# Altium PCB PCB1.PcbDoc
Units mm, origin at the board's own origin, x right, y up, seen from the top; angles counter-clockwise.
Board outline 45 x 30 mm, 4 copper layers (Top Layer, Layer 1, Layer 2, Bottom Layer), stack 1.2 mm thick; 31 components, 21 nets, 116 pads, 35 vias.
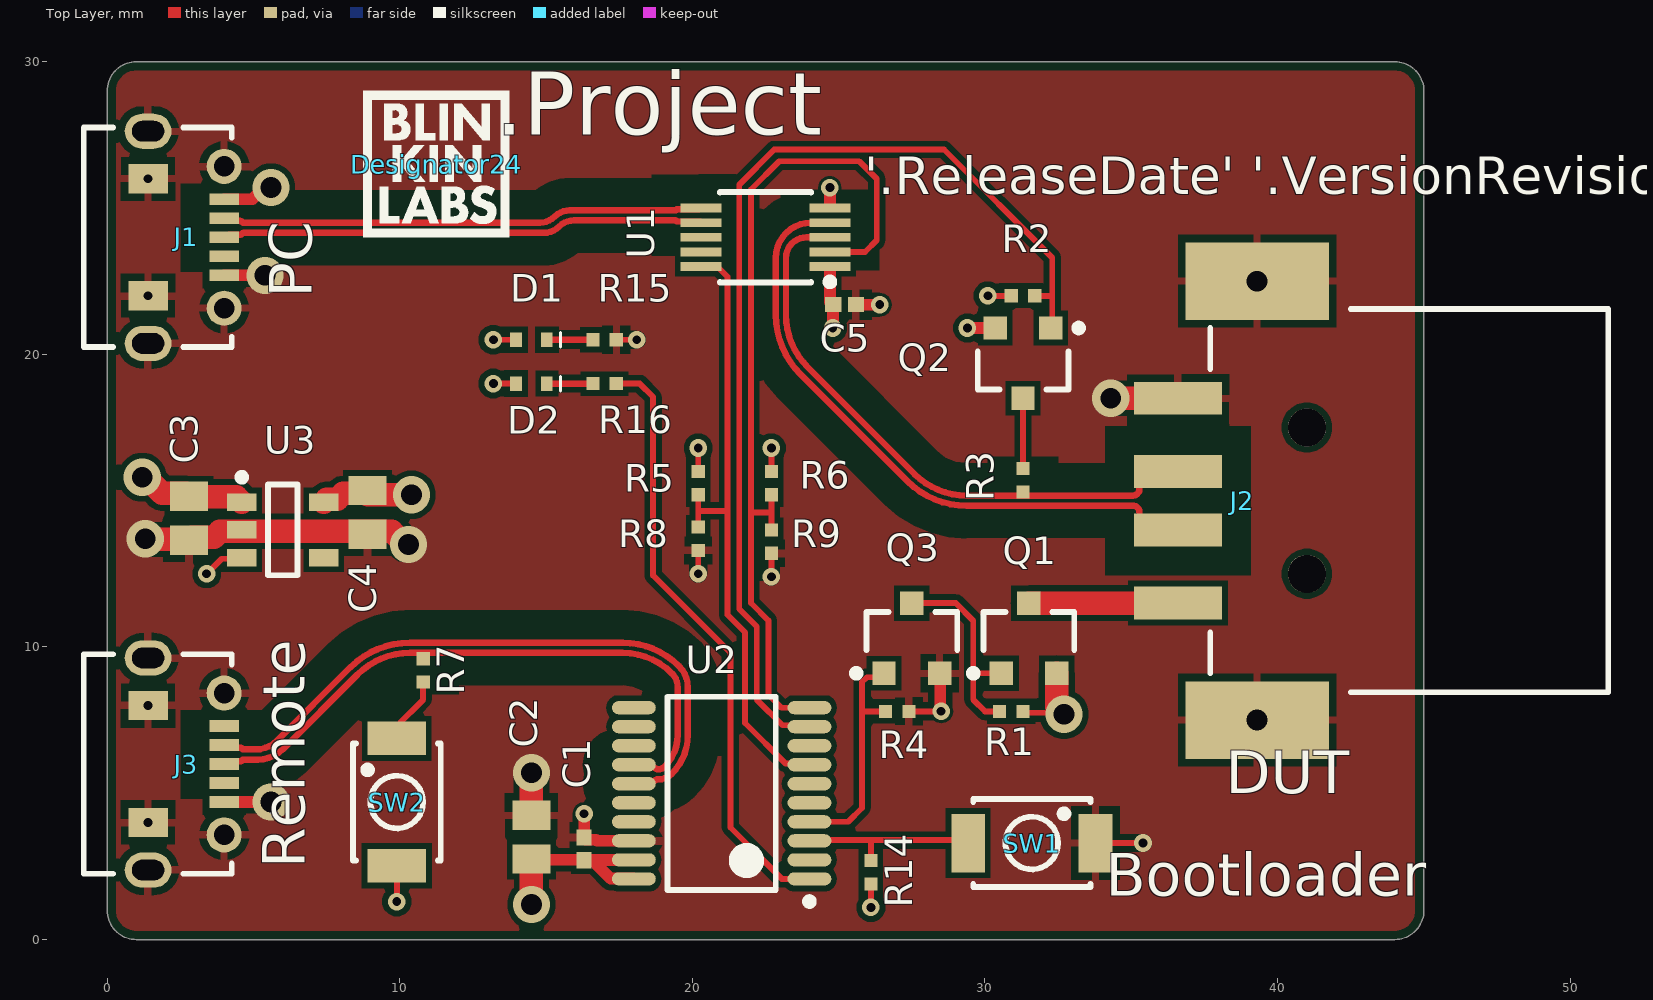
[diagram p0: Top Layer view]
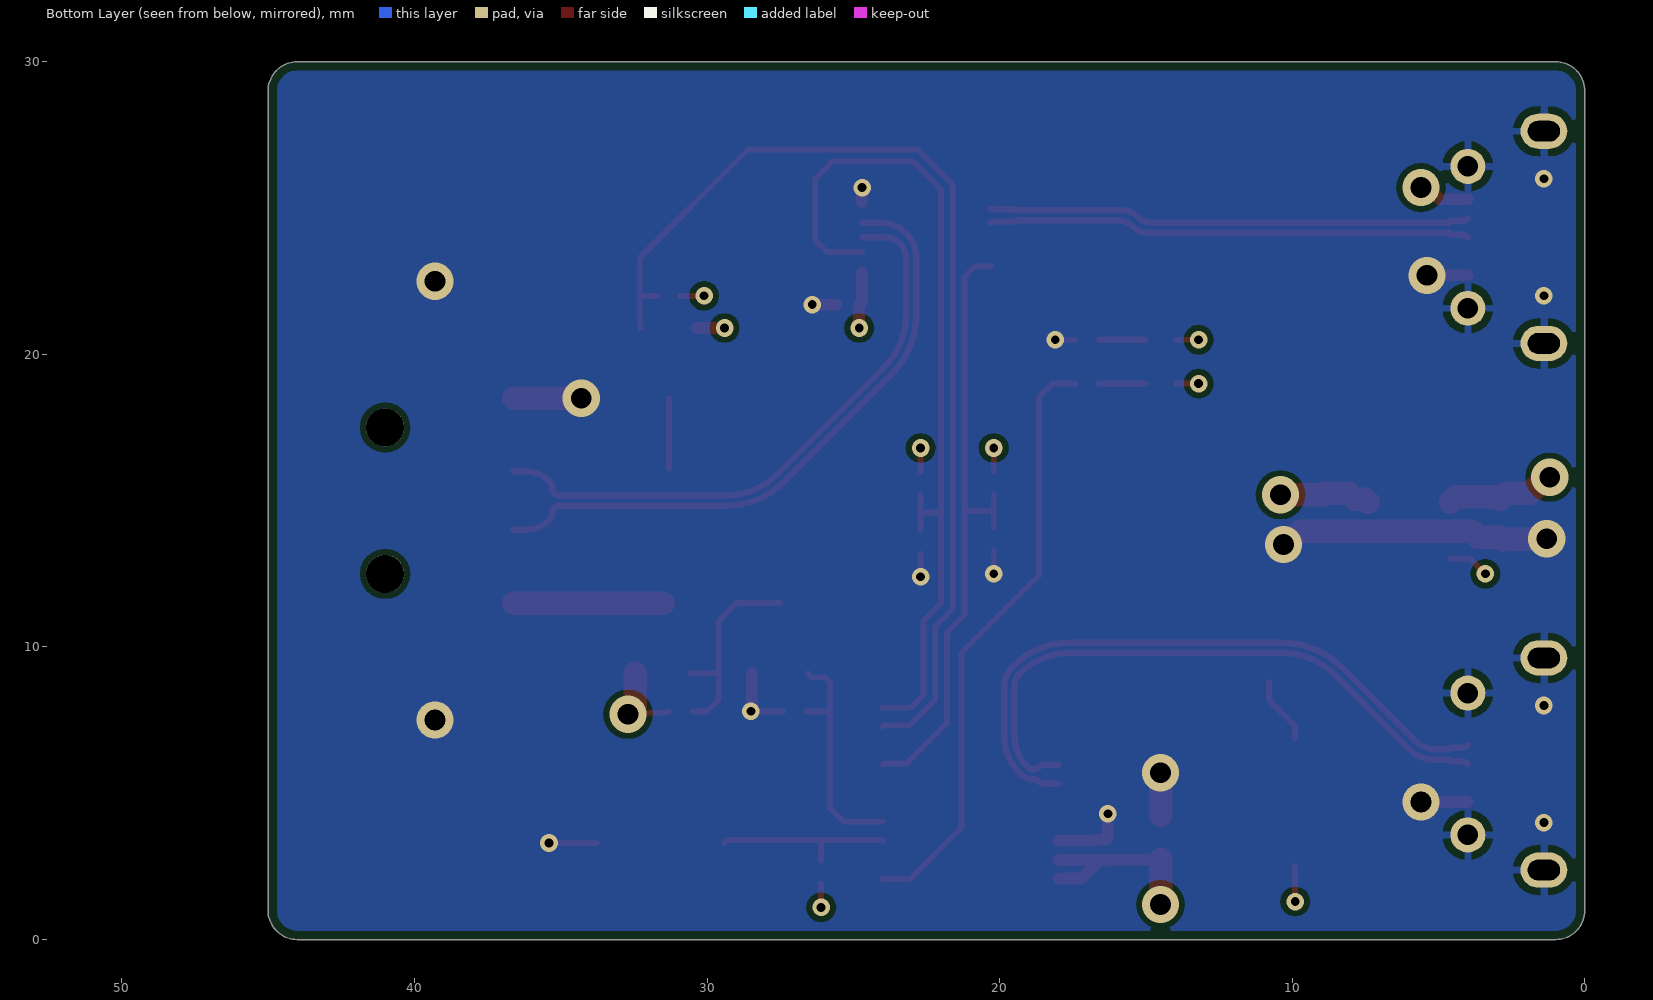
[diagram p1: Bottom Layer view, seen from below]
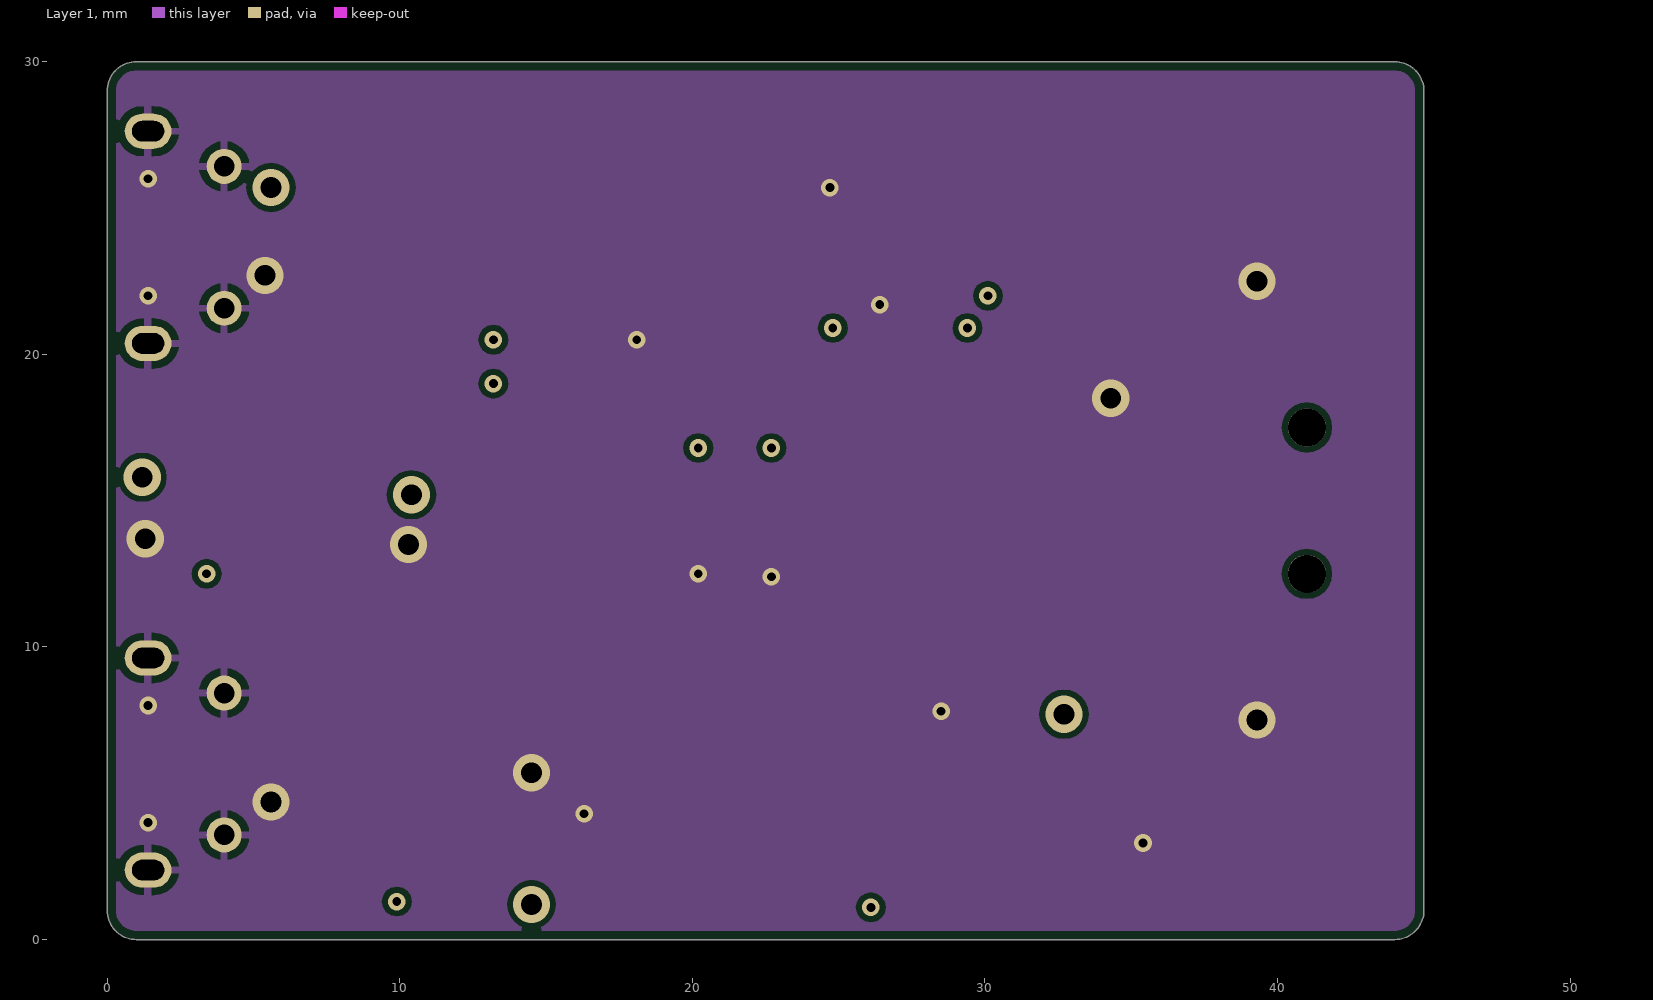
[diagram p2: Layer 1]
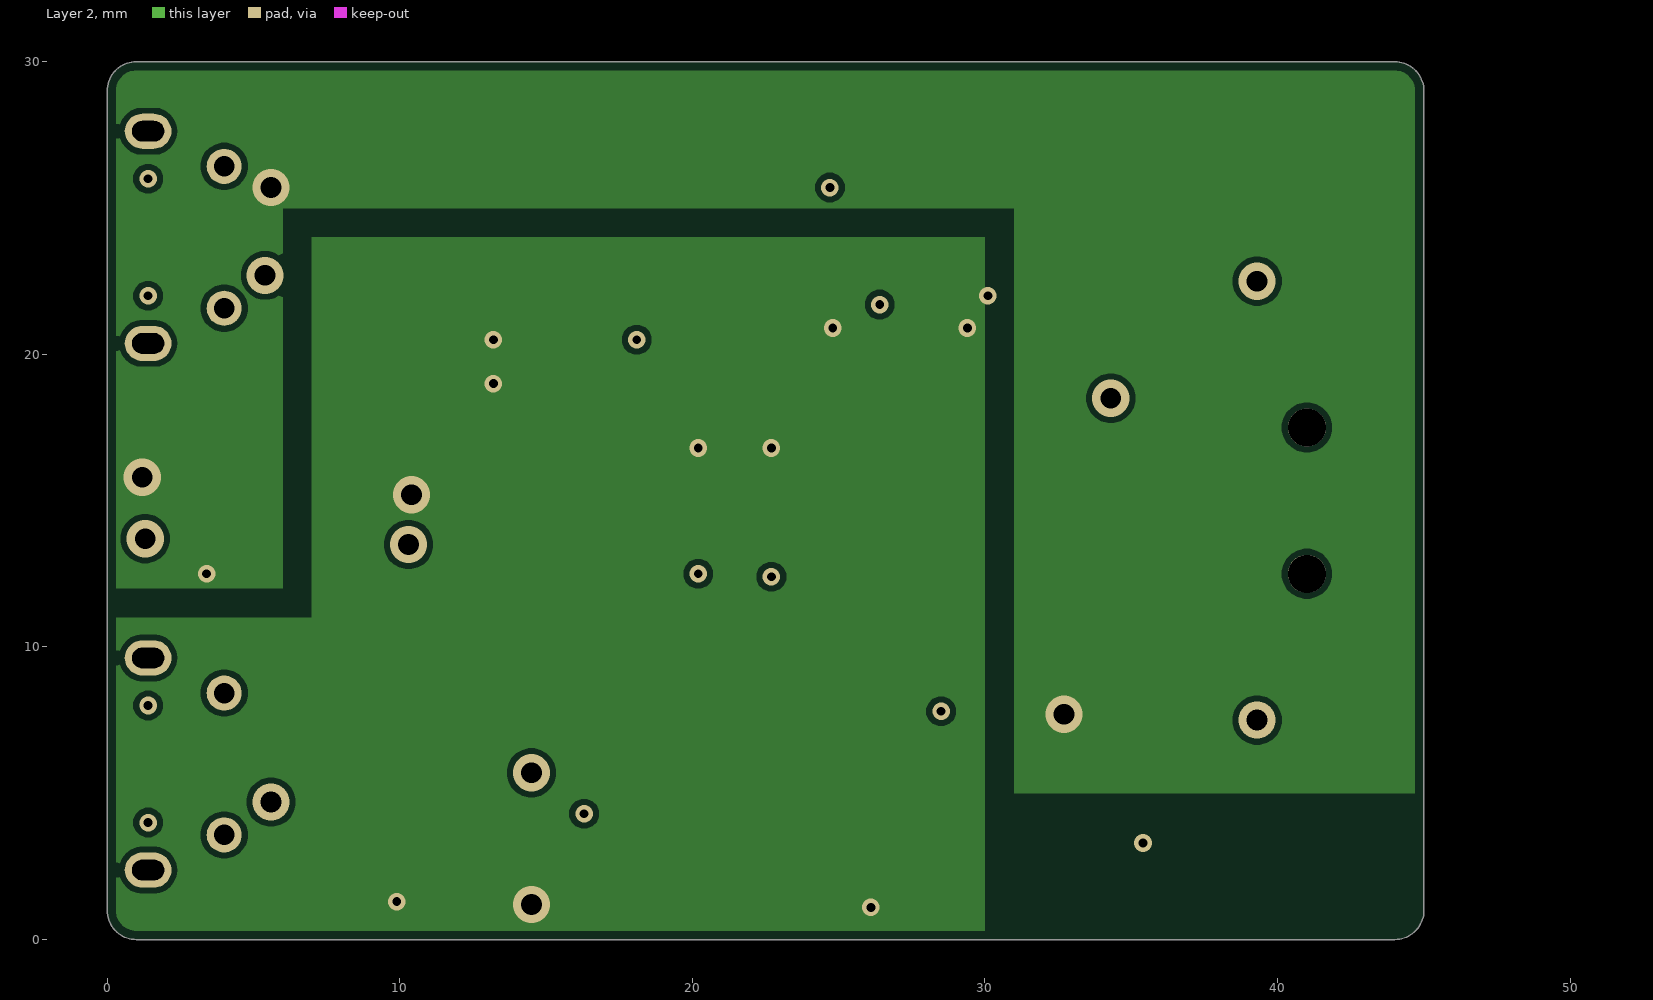
[diagram p3: Layer 2]

## Layer stack, top to bottom
Top Solder: solder mask 0.0127, SM-001, Dk 4
Top Layer: signal copper 0.035
Dielectric 2: prepreg 0.2, PP-022, Dk 4.6
Layer 1: signal copper 0.0152
Dielectric 3: core 0.7, Core-039, Dk 4.8
Layer 2: signal copper 0.0152
Dielectric 4: prepreg 0.2, PP-022, Dk 4.6
Bottom Layer: signal copper 0.035
Bottom Solder: solder mask 0.0127, SM-001, Dk 4

## Board outline
0,1 0,29 cw(c1,29) 1,30 44,30 cw(c44,29) 45,29 45,1 cw(c44,1) 44,0 1,0 cw(c1,1)

## Design rules (kind name [scope] priority, off if disabled: settings)
BoardOutlineClearance [All] p1: gap=0.1 ignorepadtopadclearanceinfootprint=FALSE except(0.3: Poly-OutlineEdge)
Clearance clearance_d90_poly [InDifferentialPairClass('D90') vs InPolygon] p1: gap=1 ignorepadtopadclearanceinfootprint=FALSE
Clearance Clearance_d90 [InDifferentialPairClass('D90') vs InDifferentialPairClass('D90')] p2: gap=0.127 ignorepadtopadclearanceinfootprint=FALSE
Clearance [All] p3: gap=0.2 ignorepadtopadclearanceinfootprint=FALSE
DiffPairsRouting [InDifferentialPairClass('D90')] p1: maxlimit=0.127 minlimit=0.127 mostfreqgap=0.127 toplayer_minwidth=0.219 toplayer_maxwidth=0.219 toplayer_prefwidth=0.219 midlayer1_minwidth=0.141 midlayer1_maxwidth=0.141 midlayer1_prefwidth=0.141 midlayer2_minwidth=0.141 midlayer2_maxwidth=0.141 midlayer2_prefwidth=0.141 bottomlayer_minwidth=0.219 bottomlayer_maxwidth=0.219 bottomlayer_prefwidth=0.219 impedanceprofiledriven=TRUE impedanceprofileid={A86DC79D-07D8-4C65-9035-73B023BCCF34} impedanceprofilevalue=90.000000 maxuncoupledlength=12.7
PlaneClearance [All] p1: clearance=2
PolygonConnect [All] p1: thpad.connectstyle=Relief thpad.reliefconductorwidth=0.254 thpad.reliefentries=4 thpad.polygonreliefangle="90 Angle" thpad.airgapwidth=0.254 smdpad.connectstyle=Relief smdpad.reliefconductorwidth=0.254 smdpad.reliefentries=4 smdpad.polygonreliefangle="90 Angle" smdpad.airgapwidth=0.254 via.connectstyle=Direct via.reliefconductorwidth=0.254 via.reliefentries=4 via.polygonreliefangle="90 Angle" via.airgapwidth=0.254
RoomDefinition Sheet1 [InComponentClass('Sheet1')] p1: confinementstyle=ConfineIn formatcopy=TRUE lockcomponents=FALSE outline -4.225,-10 59,-10 59,35 -4.225,35
RoutingVias [All] p1: holewidth=0.711 width=1.27 viastyle="Through Hole" minholewidth=0.3 minwidth=0.6 maxholewidth=0.711 maxwidth=1.27
SolderMaskExpansion SolderMaskExpansion_via [isvia] p1: expansion=-99 istentingtop=FALSE
SolderMaskExpansion [All] p2: expansion=0.102 istentingtop=FALSE
SupplyNets "Schematic Supply Nets_3" [InNet('+3.3V')] p1: voltage=0.000
SupplyNets "Schematic Supply Nets_2" [InNet('+5_OUT')] p2: voltage=0.000
SupplyNets "Schematic Supply Nets_1" [InNet('+5')] p3: voltage=0.000
SupplyNets "Schematic Supply Nets" [InNet('GND')] p4: voltage=0.000
Width [All] p1: maxlimit=0.8 minlimit=0.2 preferedwidth=0.4
28 further rules are at their usual default settings.

## Classes and differential pairs
differential pair class D90: DUT_D DUT_IN_D PROG_D
differential pair DUT_D: +DUT_D_P -DUT_D_N
differential pair PROG_D: +PROG_D_P -PROG_D_N
differential pair DUT_IN_D: +DUT_IN_D_P -DUT_IN_D_N

## Components (designator, comment, footprint, x,y, rotation, side; value= is the part's Value field where it differs from the comment)
C1 "100nF" CAPC1005X06L 16.3,3.1 r90 top
C2 "10uF" CAPC2012X10L 14.5,3.5 r90 top
C3 "10uF" CAPC2012X10L 2.8,14.4 r270 top
C4 "10uF" CAPC2012X10L 8.9,14.6 r270 top
C5 "100nF" CAPC1005X06L 25.2,21.7 r0 top
D1 "BL-HUB37A-AV-TRB" BL-Hxx37A-AV-TRB 14.5,20.5 r0 top
D2 "BL-HGE37A-AV-TRB" BL-Hxx37A-AV-TRB 14.5,19 r0 top
Designator24 "Comment" bl_logo_5mm 11.25,26.5 r0 top
J1 "A01SB741B1-267" A01SB741B1-267 4,24 r90 top
J2 "904-241A2032S10100" C42605 41,15 r90 top
J3 "A01SB741B1-267" A01SB741B1-267 4,6 r90 top
Q1 "AO3401A" AO-SOT-23-3L_V 31.5,10.3 r90 top
Q2 "AO3401A" AO-SOT-23-3L_V 31.3,19.7 r270 top
Q3 "AO3400A" AO-SOT-23-3L_V 27.5,10.3 r90 top
R1 "10k" ERJ2G(0402)_L 30.9,7.8 r0 top value=10K
R2 "10k" ERJ2G(0402)_L 31.3,22 r180 top value=10K
R3 "10k" ERJ2G(0402)_L 31.3,15.7 r90 top value=10K
R4 "10k" ERJ2G(0402)_L 27,7.8 r180 top value=10K
R5 "10k" ERJ2G(0402)_L 20.2,15.6 r90 top value=10K
R6 "DNP" ERJ2G(0402)_L 22.7,15.6 r90 top
R7 "10k" ERJ2G(0402)_L 10.8,9.2 r270 top value=10K
R8 "DNP" ERJ2G(0402)_L 20.2,13.7 r90 top
R9 "10k" ERJ2G(0402)_L 22.7,13.6 r90 top value=10K
R14 "DNP" ERJ2G(0402)_L 26.1,2.3 r270 top
R15 "1k" ERJ2G(0402)_L 17,20.5 r0 top value=1K
R16 "1k" ERJ2G(0402)_L 17,19 r0 top value=1K
SW1 "TS-1185-B-A-B-A" TS-1185 31.6,3.3 r180 top
SW2 "TS-1185-B-A-B-A" TS-1185 9.9,4.7 r270 top
U1 "FSUSB42MUX" FP-846AP-MFG 22.5,24 r180 top
U2 "CH554T" TSOP65P660X110-20N 21,5 r180 top
U3 "BL8568CB5ATR33" SOT95P280X130-5N-2 6,14 r0 top

## Footprints (in the part's own frame and the unit in brackets; to place one, negate y for a bottom-side part, rotate by r counter-clockwise, add the part's x,y. Pads: shape width x height; smd on the part's side, far side on the other; paste and mask are expansions set on the pad)
A01SB741B1-267 [mm] "micro usb B type"
  rect 0.4x1 smd: D+(0,0) D-(0.65,0) GND(-1.3,0) ID(-0.65,0) VBUS(1.3,0)
  rrect100% 1.2x1.6 hole 0.7 slot 1.1 at 90 deg: S1(-3.625,2.6) S2(3.625,2.6)
  round 1.2 hole 0.7: S3(-2.425,0) S4(2.425,0)
  rect 1x1.35 smd: S5(-2,2.6) S6(2,2.6)
  silkscreen extent -3.75,-0.26 3.75,4.8, body extent -3.75,-0.3 3.75,4.78, height 2.44
AO-SOT-23-3L_V [mm] "SOT23, 3-Leads, Body 3.1x1.8mm, Pitch 0.95mm"
  rect 0.8x0.8 smd: 1(-1.2,0.95) 2(-1.2,-0.95) 3(1.2,0)
  silkscreen extent -1.32,-1.55 0.9,2.02, body extent -1.5,-1.55 1.5,1.55, height 1.25
BL-Hxx37A-AV-TRB [mm] "0402 LED, generic"
  rect 0.4x0.5 smd: 1(-0.525,0) 2(0.525,0)
  silkscreen extent 1,-0.25 1,0.25, body extent -0.5,-0.25 0.5,0.25, height 0.4
bl_logo_5mm [mm]
  silkscreen extent -2.5,-2.5 2.5,2.5
C42605 [mm] "USB-A SMD"
  rect 1.12x3 smd: 1(-3.5,4.4) 2(-1,4.4) 3(1,4.4) 4(3.5,4.4)
  rect 2.65x4.9 smd: 5(7.5,1.7) 6(-7.5,1.7)
  round 1.3 hole 1.3 unplated paste-2539.97 mask+0: ALIGN_2(-2.5,0) ALIGN_2(2.5,0)
  silkscreen extent -6.55,-10.3 6.55,3.3, body extent -8.05,-10.3 8.05,4.8, height 7
CAPC1005X06L [mm] "Chip Capacitor, 2-Leads, Body 1.00x0.50mm, IPC High Density"
  rect 0.56x0.52 smd: 1(-0.39,0) 2(0.39,0)
  body extent -0.53,-0.28 0.53,0.28, height 0.55
CAPC2012X10L [mm] "Chip Capacitor, 2-Leads, Body 2.00x1.25mm, IPC High Density"
  rect 1x1.3 smd: 1(-0.75,0) 2(0.75,0)
  body extent -1.05,-0.67 1.05,0.68, height 0.95
ERJ2G(0402)_L [mm] "Chip Resistor, 2-Leads, Body 1.00x0.50mm, IPC High Density"
  rect 0.45x0.45 smd: 1(-0.4,0) 2(0.4,0)
  body extent -0.53,-0.27 0.53,0.28, height 0.4
FP-846AP-MFG [mm]
  rect 1.4x0.3 smd paste+0 mask+0: 1(-2.2,1) 2(-2.2,0.5) 3(-2.2,0) 4(-2.2,-0.5) 5(-2.2,-1) 6(2.2,-1) 7(2.2,-0.5) 8(2.2,0) 9(2.2,0.5) 10(2.2,1)
  silkscreen extent -2.33,-1.55 1.55,1.65, body extent -3,-1.65 3,1.65, height 0.25
SOT95P280X130-5N-2 [mm] "SOT23, 5-Leads, Body 2.90x2.80mm, Pitch 0.95mm, IPC Medium Density"
  rect 1x0.6 smd: 1(-1.4,0.95) 2(-1.4,0) 3(-1.4,-0.95) 4(1.4,-0.95) 5(1.4,0.95)
  silkscreen extent -1.52,-1.55 0.5,1.92, body extent -1.55,-1.55 1.55,1.55, height 1.3
TS-1185 [mm] "3x4x2mm Tact Switch, no alignment pin"
  rect 1.15x2 smd: 1(-2.175,0) 2(2.175,0)
  silkscreen extent -2,-1.5 2,1.5, body extent -2,-1.5 2,1.5, height 2
TSOP65P660X110-20N [mm] "TSOP, 20-Leads, Body 6.50x4.40mm, Pitch 0.65mm, IPC Medium Density"
  oval 1.5x0.45 smd: 1(-3,2.925) 2(-3,2.275) 3(-3,1.625) 4(-3,0.975) 5(-3,0.325) 6(-3,-0.325) 7(-3,-0.975) 8(-3,-1.625) 9(-3,-2.275) 10(-3,-2.925) 11(3,-2.925) 12(3,-2.275) 13(3,-1.625) 14(3,-0.975) 15(3,-0.325) 16(3,0.325) 17(3,0.975) 18(3,1.625) 19(3,2.275) 20(3,2.925)
  silkscreen extent -3.13,-3.3 1.85,3.82, body extent -3.3,-3.3 3.3,3.3, height 1.1

## Part data
C1 C5: library part CC0402KRX5R9BB104, "CAP SMD 100nF 10% 50V X5R 0402", Case/Package=0402, Manufacturer 1=Yageo, Supplier Part Number 1=311-3342-2-ND, Tolerance=10%, Voltage=50V, Kicad Footprint=bl_footprints:CAPC1005X06L, Kicad Symbol=Device:C, Manufacturer Part Number 1=CC0402KRX5R9BB104, Part Name=CC0402KRX5R9BB104, Supplier 1=DigiKey, Type=X5R
C2 C3 C4: library part CC0805KRX5R8BB106, "CAP SMD 10uF 10% 25V X5R 0805", Case/Package=0805, Manufacturer 1=Yageo, Supplier Part Number 1=13-CC0805KRX5R8BB106TR-ND, Tolerance=10%, Voltage=25V, Kicad Footprint=bl_footprints:CAPC2012X10L, Kicad Symbol=Device:C, Manufacturer Part Number 1=CC0805KRX5R8BB106, Part Name=CC0805KRX5R8BB106, Supplier 1=DigiKey, Type=X5R
D1: "LED, 0402, Super Red, 50mcd@20mA, 627~637nm", Case/Package=0402, Manufacturer 1=BrtLed, Supplier Part Number 1=C165980, id=80, Kicad Footprint=LED_SMD:LED_0402_1005Metric, Kicad Symbol=Device:LED, Manufacturer Part Number 1=BL-HUB37A-AV-TRB, Part Name=BL-HUB37A-AV-TRB, Supplier 1=LCSC
D2: "LED, 0402, Super Yellow Green, 35mcd@20mA, 566~576nm", Case/Package=0402, Manufacturer 1=BrtLed, Supplier Part Number 1=C165979, id=78, Kicad Footprint=LED_SMD:LED_0402_1005Metric, Kicad Symbol=Device:LED, Manufacturer Part Number 1=BL-HGE37A-AV-TRB, Part Name=BL-HGE37A-AV-TRB, Supplier 1=LCSC
Designator24: library part bl_logo_5mm
J1 J3: "Micro USB B type ??????", Case/Package=SMD, Manufacturer 1=Unknown/Generic, id=40, Manufacturer Part Number 1=Unknown/Generic, Part Name=A01SB741B1-267
J2: "USB A connector, SMD, no tabs", Case/Package=SMD, Manufacturer 1="Jing Extension of the Electronic Co.", Supplier Part Number 1=C42605, id=38, Manufacturer Part Number 1=904-241A2032S10100, Part Name=904-241A2032S10100, Supplier 1=LCSC
Q1 Q2: "MOSFET P-CH 30V 4A SOT23-3L", Case/Package=SOT-23-3, Manufacturer 1="Alpha & Omega Semiconductor Inc.", Manufacturer Case/Package 1="3-SMD, SOT-23-3 Variant", Supplier Part Number 1=785-1001-2-ND, id=47, Manufacturer Part Number 1=AO3401A, Part Name=AO3401A, Supplier 1=DigiKey, Supplier 2=LCSC, Supplier Part Number 2=C15127
Q3: "MOSFET N-CH 30V 5.7A SOT23-3L", Case/Package=SOT-23-3, Manufacturer 1="Alpha & Omega Semiconductor Inc.", Manufacturer Case/Package 1="3-SMD, SOT-23-3 Variant", Supplier Part Number 1=785-1000-2-ND, id=46, Manufacturer Part Number 1=AO3400A, Part Name=AO3400A, Part Status=Discontinued, Supplier 1=DigiKey, Supplier 2=LCSC, Supplier Part Number 2=C20917
R1 R2 R3 R4 R5 R7 R9: library part RC0402JR-0710KL, "RES SMD 10K OHM 5% 1/16W 0402", Case/Package=0402, Manufacturer 1=Yageo, Power=1/16W, Supplier Part Number 1=311-10KJRTR-ND, Tolerance=5%, Kicad Footprint=bl_footprints:ERJ2G(0402)_L, Kicad Symbol=Device:R_US, Manufacturer Part Number 1=RC0402JR-0710KL, Part Name=RC0402JR-0710KL, Supplier 1=DigiKey
R6 R8 R14: library part RES_0402_DNP, Package / Case="0402 (1005 Metric)", Part Name=RES_0402_DNP, PartNumber=DNP
R15 R16: library part RC0402JR-071KL, "RES SMD 1K OHM 5% 1/16W 0402", Case/Package=0402, Manufacturer 1=Yageo, Power=1/16W, Supplier Part Number 1=311-1.0KJRTR-ND, Tolerance=5%, Kicad Footprint=bl_footprints:ERJ2G(0402)_L, Kicad Symbol=Device:R_US, Manufacturer Part Number 1=RC0402JR-071KL, Part Name=RC0402JR-071KL, Supplier 1=DigiKey
SW1 SW2: "Tactile switch, SPST, 3x4mm, 50mA 160gf 12V, no mounting pins", Case/Package=SMD, Manufacturer 1=XKB, Supplier Part Number 1=C561517, id=293, Kicad Footprint=bl_footprints:TS-1185, Kicad Symbol=Switch:SW_Push, Manufacturer Part Number 1=TS-1185-B-A-B-A, Part Name=TS-1185-B-A-B-A, Supplier 1=LCSC
U1: "USB Switch IC 1 Channel 10-MSOP", Case/Package="10-TFSOP, 10-MSOP (0.118\", 3.00mm Width)", Manufacturer 1=onsemi, Manufacturer Case/Package 1=10-MSOP, Supplier Part Number 1=FSUSB42MUXCT-ND, id=661, Manufacturer Part Number 1=FSUSB42MUX, Part Name=FSUSB42MUX, Supplier 1=DigiKey, Supplier 2=LCSC, Supplier Part Number 2=C11355
U2: "8-bit enhanced USB microcontroller", Manufacturer 1=WCH, Manufacturer Case/Package 1=TSSOP-20, Supplier Part Number 1=C2928938, id=104, Manufacturer Part Number 1=CH554T, Part Name=CH554T, Supplier 1=LCSC
U3: "500mA High PSRR, Linear Regulator, w. Output Discharge", Manufacturer 1="Shanghai Belling", Supplier Part Number 1=C243122, id=88, Manufacturer Part Number 1=BL8568CB5ATR33, Part Name=BL8568CB5ATR33, Supplier 1=LCSC

## Via types
v1: diameter 0.6, hole 0.3, Top Layer to Bottom Layer, 22 vias
v2: diameter 1.27, hole 0.711, Top Layer to Bottom Layer, 13 vias

## Nets (pads, with @x,y where several pads share a name; then routed paths per layer and width w, separated by ;. In a path a pad name is that pad's centre, name@x,y a point inside that pad or via, vN(x,y) a via of type N, cw(c..) or ccw(c..) an arc to the next point about the centre after c; other vN are vias at no path point)
+3.3V: C1.1 C2.1 C4.1 C5.1 D1.1 D2.1 Q2.2 R2.2 R5.2 R6.2 R14.2 SW2.2 U1.1 U2.19 U2.20 U3.5 | length 19
  Top Layer w0.2: v1(9.9,1.3) SW2.2 ; v1(13.2,19) D2.1 ; v1(13.2,20.5) D1.1 ; R5.2 v1(20.2,16.8) ; R6.2 v1(22.7,16.8) ; v1(26.1,1.1) R14.2 ; v1(30.1,22) R2.2
  Top Layer w0.4: C2.1 14.52,2.73 16.28,2.73 C1.1 ; U2.20 17.99,2.085 17.215,2.085 16.6,2.7 16.31,2.7 C1.1 ; U2.19 17.992,2.718 16.308,2.718 C1.1 ; 24.7,22.8 24.7,21.79 24.79,21.7 C5.1 24.805,21.695 24.805,20.905 v1(24.8,20.9) ; v1(29.4,20.9) Q2.2
  Top Layer w0.8: U3.5 7.5,15.05 7.869,15.05 8.069,15.25 C4.1@8.9,15.25 ; C4.1@8.9,15.2 v2(10.4,15.2) ; v2(14.5,1.2) C2.1
+5: C3.1 J1.VBUS Q1.2 R1.2 U3.1 U3.3 | length 10
  Top Layer w0.2: v1(3.4,12.5) 3.917,13.017 4.567,13.017 U3.3 ; R1.2 31.35,7.75 32.65,7.75 v2(32.7,7.7)
  Top Layer w0.4: J1.VBUS 4.965,25.3 5.365,25.7 v2(5.6,25.7)
  Top Layer w0.8: v2(1.2,15.8) 1.327,15.8 1.877,15.25 2.7,15.25 C3.1@2.9,15.05 ; C3.1 2.811,15.139 4.411,15.139 U3.1 ; Q1.2 32.45,7.95 v2@32.65,7.75
+5_OUT: J2.1 Q1.3 | length 5.1
  Top Layer w0.8: Q1.3 J2.1
ACTIVE: R16.2 U2.1 | length 20.7
  Top Layer w0.2: R16.2 18.2,19 18.66,18.54 18.66,12.44 21.3,9.8 21.3,3.829 23.054,2.075 U2.1
B\O\O\T\_\E\N\: Q2.1 R2.1 U2.9 | length 35.8
  Top Layer w0.2: U2.9 23.952,7.323 23.077,7.323 22.2,8.2 22.2,10.7 21.6,11.3 21.6,25.8 22.8,27 28.6,27 32.3,23.3 32.3,22 ; R2.1 32.3,22 ; Q2.1 32.3,20.95 32.3,22
DUT_D_N: J2.2 U1.4 | length 21.8
  Top Layer w0.219: U1.4 24.054,24.5 ccw(c24.054,23.3) 22.854,23.3 22.854,21.351 ccw(c25.737,21.351) 23.698,19.312 27.34,15.671 ccw(c29.377,17.708) 29.377,14.827 35.057,14.827 cw(c35.057,14.608) 35.212,14.763 cw(c35.057,14.608) 35.276,14.608 ccw(c35.656,14.608) 35.388,14.339 ccw(c36.206,15.158) 36.206,14 J2.2
DUT_D_P: J2.3 R3.1 U1.3 | length 20.6
  Top Layer w0.219: U1.3 23.9,24 ccw(c23.9,23.3) 23.2,23.3 23.2,21.352 ccw(c25.74,21.352) 23.944,19.556 27.583,15.917 ccw(c29.379,17.713) 29.379,15.173 35.057,15.173 ccw(c35.057,15.392) 35.212,15.237 ccw(c35.057,15.392) 35.276,15.392 cw(c35.656,15.392) 35.388,15.661 cw(c36.206,14.842) 36.206,16 J2.3
DUT_IN_D_N: J1.D- U1.6 | length 16.5
  Top Layer w0.219: J1.D- ccw(c4.218,24.868) 4.218,24.56 4.535,24.56 cw(c4.535,24.455) 4.609,24.529 ccw(c4.683,24.603) 4.683,24.498 14.784,24.498 ccw(c14.784,25.224) 15.297,24.711 cw(c15.81,24.198) 15.81,24.923 19.409,24.923 ccw(c19.409,24.985) 19.454,24.941 cw(c19.498,24.897) 19.498,24.96 20.202,24.96 ccw(c20.202,25.098) U1.6
DUT_IN_D_P: J1.D+ U1.7 | length 16.5
  Top Layer w0.219: J1.D+ cw(c4.218,23.782) 4.218,24.09 4.535,24.09 ccw(c4.535,24.195) 4.609,24.121 cw(c4.683,24.047) 4.683,24.152 14.928,24.152 ccw(c14.928,24.877) 15.441,24.364 cw(c15.954,23.851) 15.954,24.577 19.409,24.577 cw(c19.409,24.515) 19.454,24.559 ccw(c19.498,24.603) 19.498,24.54 20.202,24.54 cw(c20.202,24.402) U1.7
GND: C1.2 C2.2 C3.2 C4.2 C5.2 J1.GND J1.S1 J1.S2 J1.S3 J1.S4 J1.S5 J1.S6 J2.4 J2.5 J2.6 J3.GND J3.S1 J3.S2 J3.S3 J3.S4 J3.S5 J3.S6 Q3.2 R4.1 R8.1 R9.1 R15.2 SW1.1 U1.5 U2.18 U3.2 | length 26.2
  Top Layer w0.2: R15.2 v1(18.1,20.5) ; v1(20.2,12.5) R8.1 ; v1(22.7,12.4) R9.1 ; R4.1 v1(28.5,7.8) ; SW1.1 v1(35.4,3.3)
  Top Layer w0.4: J3.GND v2(5.6,4.7) ; J1.GND v2(5.4,22.7) ; v1(16.3,4.3) C1.2 16.3,3.47 16.36,3.41 16.706,3.41 16.741,3.375 U2.18 ; 24.7,25.2 v1(24.7,25.7) ; C5.2 v1(26.4,21.7) ; Q3.2 28.475,9.075 28.475,7.825 v1(28.5,7.8)
  Top Layer w0.8: v2(1.3,13.7) 1.325,13.675 2.775,13.675 C3.2 2.9,13.75 3.651,13.75 3.851,13.95 U3.2@4.55,13.95 ; U3.2@4.7,13.95 8.9,13.95 9.723,13.95 10.173,13.5 v2(10.3,13.5) ; C2.2 v2(14.5,5.7) ; v2(34.3,18.5) J2.4
  other v1: 1.4,4 1.4,8 1.4,22 1.4,26
  other v2: 39.3,7.5 39.3,22.5
NetD1_2: D1.2 R15.1 | length 1.6
  Top Layer w0.219: D1.2 R15.1
NetD2_2: D2.2 R16.1 | length 1.6
  Top Layer w0.219: D2.2 R16.1
NetQ1_1: Q1.1 Q3.3 R1.1 | length 7.1
  Top Layer w0.2: Q3.3 29,11.5 29.6,10.9 29.6,9.1 ; R1.1 30,7.8 29.6,8.2 29.6,9.1 ; Q1.1 29.6,9.1
NetQ2_3: Q2.3 R3.2 | length 2.4
  Top Layer w0.2: R3.2 Q2.3
NetR7_2: R7.2 SW2.1 | length 2.3
  Top Layer w0.2: SW2.1 9.9,7.3 10.8,8.2 R7.2
O\E\: R5.1 R8.2 U1.10 U2.7 | length 21.4
  Top Layer w0.2: R8.2 20.2,14.65 ; R5.1 20.2,14.65 ; U1.10 20.85,23 21.2,22.65 21.2,14.65 ; U2.7 23.952,6.023 23.177,6.023 21.8,7.4 21.8,10.5 21.2,11.1 21.2,14.65 ; 20.2,14.65 21.2,14.65
POWER_EN: Q3.1 R4.2 U2.4 | length 8
  Top Layer w0.2: U2.4 25.325,4.025 25.8,4.5 25.8,7.8 ; Q3.1 26.417,8.967 25.967,8.967 25.8,8.8 25.8,7.8 ; R4.2 25.8,7.8
PROG_D_N: J3.D- U2.15 | length 22.4
  Top Layer w0.219: J3.D- ccw(c4.218,6.868) 4.218,6.56 4.535,6.56 cw(c4.535,6.455) 4.609,6.529 ccw(c4.683,6.603) 4.683,6.498 5.074,6.498 ccw(c5.074,7.547) 5.816,6.805 8.312,9.301 cw(c10.351,7.262) 10.351,10.146 17.615,10.146 cw(c17.615,7.421) 19.541,9.348 19.547,9.343 cw(c18.824,8.62) 19.846,8.62 19.846,6.996 cw(c17.962,6.996) 19.294,5.664 19.291,5.66 cw(c18.849,6.102) 18.849,5.477 18.847,5.477 ccw(c18.847,5.218) 18.663,5.401 cw(c18.48,5.584) 18.48,5.325 U2.15
PROG_D_P: J3.D+ R7.1 U2.14 | length 21.4
  Top Layer w0.219: J3.D+ cw(c4.218,5.782) 4.218,6.09 4.535,6.09 ccw(c4.535,6.195) 4.609,6.121 cw(c4.683,6.047) 4.683,6.152 5.146,6.152 ccw(c5.146,7.374) 6.01,6.51 8.556,9.056 cw(c10.352,7.26) 10.352,9.8 17.61,9.8 cw(c17.61,7.41) 19.3,9.1 cw(c18.817,8.617) 19.5,8.617 19.5,6.999 cw(c17.955,6.999) 19.047,5.906 cw(c18.847,6.107) 18.847,5.823 cw(c18.847,6.082) 18.663,5.899 ccw(c18.48,5.716) 18.48,5.975 U2.14
REBOOT: R14.1 SW1.2 U2.3 | length 6.2
  Top Layer w0.2: U2.3 24.025,3.4 26.1,3.4 ; R14.1 26.1,3.4 ; SW1.2 29.325,3.4 26.1,3.4
SEL: R6.1 R9.2 U1.2 U2.10 | length 29.8
  Top Layer w0.2: R9.2 22.7,14.6 ; R6.1 22.7,14.6 ; U2.10 23.041,7.925 22.6,8.366 22.6,10.9 22,11.5 22,14.6 ; U1.2 25.9,23.5 26.3,23.9 26.3,26 25.7,26.6 22.966,26.6 22,25.634 22,14.6 ; 22,14.6 22.7,14.6
pads on no net: J1.ID J2.ALIGN_2 J3.ID J3.VBUS U1.8 U1.9 U2.2 U2.5 U2.6 U2.8 U2.11 U2.12 U2.13 U2.16 U2.17 U3.4

## Polygon pours and split planes (outlines as drawn)
+3.3V on Layer 2 "+3.3V_L03_P003" (solid, pour order 3): 30,24 7,24 7,11 0,11 0,0 30,0
+5 on Layer 2 "+5_L03_P002" (solid, pour order 2): 45,5 45,30 0,30 0,12 6,12 6,25 31,25 31,5
GND on Bottom Layer "NONET_L01_P-001" (solid, pour order 0): 0,0 0,30 45,30 45,0
GND on Layer 1 "NONET_L01_P-001" (solid, pour order 1): 0,30 45,30 45,0 0,0
GND on Top Layer "gnd_top" (solid, pour order 4): 0,0 45,0 45,30 0,30

## Silkscreen, mask and mechanical layers (free items; w line width, h text height)
Top Overlay:
  text ".Project" at 13.274,26.783 h3.7
  text "'.ReleaseDate' '.VersionRevision'" at 25.878,25.045 h2.2
  text "PC" at 7.478,21.938 h2.5 r90
  text "DUT" at 38.227,4.522 h2.5
  text "Remote" at 7.228,2.441 h2.5 r90
  text "Bootloader" at 34.127,1.022 h2.5
Mechanical 1:
  the board outline again, w0.1
Dimensions:
  lines w0.381: -0.027,-41.144 10.384,-41.144 34,-41.144 49.236,-41.144 65.742,-41.144 80.217,-41.144 ; -0.027,-38.096 10.384,-38.096 34,-38.096 49.236,-38.096 65.742,-38.096 80.217,-38.096 ; -0.027,-35.048 10.384,-35.048 34,-35.048 49.236,-35.048 65.742,-35.048 80.217,-35.048 ; -0.027,-32 10.384,-32 34,-32 49.236,-32 65.742,-32 80.217,-32 ; -0.027,-28.952 10.384,-28.952 34,-28.952 49.236,-28.952 65.742,-28.952 80.217,-28.952 ; -0.027,-25.904 10.384,-25.904 34,-25.904 49.236,-25.904 65.742,-25.904 80.217,-25.904 ; -0.027,-22.856 10.384,-22.856 34,-22.856 49.236,-22.856 65.742,-22.856 80.217,-22.856 ; -0.027,-19.808 10.384,-19.808 34,-19.808 49.236,-19.808 65.742,-19.808 80.217,-19.808 ; -0.027,-16.76 10.384,-16.76 34,-16.76 49.236,-16.76 65.742,-16.76 80.217,-16.76 ; -0.027,-13.712 10.384,-13.712 34,-13.712 49.236,-13.712 65.742,-13.712 80.217,-13.712 ; -0.027,-10.664 80.217,-10.664 ; 10.384,-7.616 10.384,-44.192 ; 34,-7.616 34,-44.192 ; 49.236,-7.616 49.236,-44.192 ; 65.742,-7.616 65.742,-44.192 ; 10.384,-44.192 -0.027,-44.192 -0.027,-7.616 80.217,-7.616 80.217,-44.192 65.742,-44.192 ; 10.384,-44.192 34,-44.192 ; 34,-44.192 49.236,-44.192 ; 49.236,-44.192 65.742,-44.192
  text ".Project" at 0,32 h10
  text "Layer" at 1.751,-9.902 h1.52
  text "Name" at 12.162,-9.902 h1.52
  text "Material" at 35.778,-9.902 h1.52
  text "Thickness" at 51.014,-9.902 h1.52
  text "Constant" at 67.52,-9.902 h1.52
  text "Top Overlay" at 12.162,-12.95 h1.52
  text "Top Solder" at 12.162,-15.998 h1.52
  text "SM-001" at 35.778,-15.998 h1.52
  text "0.013mm" at 51.014,-15.998 h1.52
  text "4" at 67.52,-15.998 h1.52
  text "1" at 1.751,-19.046 h1.52
  text "Top Layer" at 12.162,-19.046 h1.52
  text "CF-004" at 35.778,-19.046 h1.52
  text "0.035mm" at 51.014,-19.046 h1.52
  text "Dielectric 2" at 12.162,-22.094 h1.52
  text "PP-022" at 35.778,-22.094 h1.52
  text "0.200mm" at 51.014,-22.094 h1.52
  text "4.6" at 67.52,-22.094 h1.52
  text "2" at 1.751,-25.142 h1.52
  text "Layer 1" at 12.162,-25.142 h1.52
  text "CF-004" at 35.778,-25.142 h1.52
  text "0.015mm" at 51.014,-25.142 h1.52
  text "Dielectric 3" at 12.162,-28.19 h1.52
  text "Core-039" at 35.778,-28.19 h1.52
  text "0.700mm" at 51.014,-28.19 h1.52
  text "4.8" at 67.52,-28.19 h1.52
  text "3" at 1.751,-31.238 h1.52
  text "Layer 2" at 12.162,-31.238 h1.52
  text "CF-004" at 35.778,-31.238 h1.52
  text "0.015mm" at 51.014,-31.238 h1.52
  text "Dielectric 4" at 12.162,-34.286 h1.52
  text "PP-022" at 35.778,-34.286 h1.52
  text "0.200mm" at 51.014,-34.286 h1.52
  text "4.6" at 67.52,-34.286 h1.52
  text "4" at 1.751,-37.334 h1.52
  text "Bottom Layer" at 12.162,-37.334 h1.52
  text "CF-004" at 35.778,-37.334 h1.52
  text "0.035mm" at 51.014,-37.334 h1.52
  text "Bottom Solder" at 12.162,-40.382 h1.52
  text "SM-001" at 35.778,-40.382 h1.52
  text "0.013mm" at 51.014,-40.382 h1.52
  text "4" at 67.52,-40.382 h1.52
  text "Bottom Overlay" at 12.162,-43.43 h1.52
  text "Total board thickness:" at 1.751,-46.478 h1.52
  text "1.226mm" at 51.014,-46.478 h1.52
  text "Silkscreen: white / don't care / Soldermask: green / don't care / Surface finish: ENIG / Copper weight: 1oz outer, 0.5oz inner" at -1,-69 h1.52

## Dimensions
0,1 to 45,1 on Dimensions
1,30 to 1,0 on Dimensions